# EAGLE board ScaleOffset-R3 (EAGLE 6.5.0)
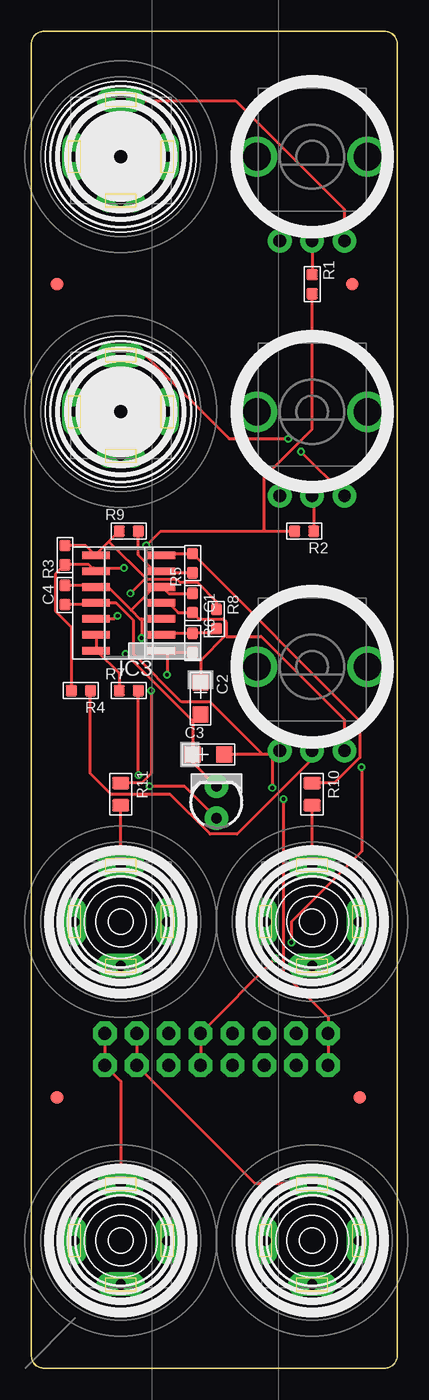
[diagram p0: board, top side]
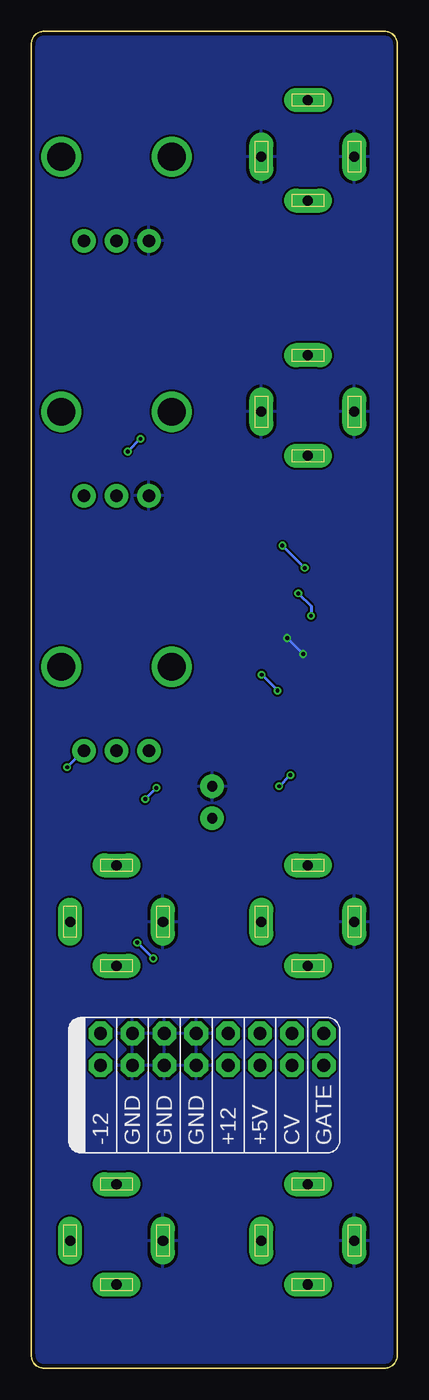
[diagram p1: board, bottom side, seen from below]

Size 29.14 x 106.5 mm. Coordinates in mm from the lower left corner, seen from the top.
Copper layers (1*16): Top 0.035mm / dielectric 1.5mm / Bottom 0.035mm
Design rules "ITEADstudio_DRC": minimum track width 6mil, minimum drill 12mil, track to track 6mil, track to pad 6mil, pad to pad 6mil, via to via 6mil, smd to smd 0mil, copper to edge 10mil, drill to drill 10mil, minimum pad ring 10mil, minimum via ring 6mil, stop-mask expansion 2mil, vias tented up to drill 100mil, thermal gap 10mil
Net classes: 0 default: width 0.254 mm

## Footprints (pad centres in the part's own frame; a part is rotated, then mirrored left to right if it is on the bottom)
C0603 = smd 0.889 x 0.889: 1 -0.762,0; 2 0.762,0
AVX-A = smd 1.27 x 1.27: + -1.27,0; - 1.27,0
3.5MM-JACK-SWITCH-13MM-OUTPUT = drill 0.8 pad 1.93 long: RING@3 -3.7,0; SECOND@3 0,-3.5; SWITCH@3 3.7,0; TIP@3 0,4.5
OG-POTS_ALPS_POT_VERTICAL = drill 1 pad 1.88: P$1 -2.58,-6.7; P$2 0,-6.7; P$3 2.58,-6.7 | drill 2.2 pad 3.175: P$4 4.4,0; P$5 -4.4,0
SO14 = smd 0.6 x 2.2: 1 -3.81,-2.6; 2 -2.54,-2.6; 3 -1.27,-2.6; 4 0,-2.6; 5 1.27,-2.6; 6 2.54,-2.6; 7 3.81,-2.6; 8 3.81,2.6; 9 2.54,2.6; 10 1.27,2.6; 11 0,2.6; 12 -1.27,2.6; 13 -2.54,2.6; 14 -3.81,2.6
3.5MM-JACK-SWITCH-13MM-INPUT = drill 0.8 pad 1.93 long: RING@3 -3.7,0; SECOND@3 0,-3.5; SWITCH@3 3.7,0; TIP@3 0,4.5
LED3MM = drill 0.813 pad 1.88: A -1.27,0; K 1.27,0
R0603 = smd 0.889 x 0.889: 1 -0.762,0; 2 0.762,0
C0805 = smd 1.016 x 1.397: 1 -0.889,0; 2 0.889,0
FIDUCIAL_1MM = smd 1 x 1: 1 0,0
POWER_16 = drill 1.016 pad 1.88 octagon: 1 -6.35,-1.27; 2 -6.35,1.27; 3 -3.81,-1.27; 4 -3.81,1.27; 5 -1.27,-1.27; 6 -1.27,1.27; 7 1.27,-1.27; 8 1.27,1.27; 9 3.81,-1.27; 10 3.81,1.27; 11 6.35,-1.27; 12 6.35,1.27; 13 8.89,-1.27; 14 8.89,1.27; 15 11.43,-1.27; 16 11.43,1.27

## Placement (x,y rotation side)
C1  100n  [C0603]  12.84,60.96 270 top
C2  [AVX-A]  13.47,53.34 270 top
C3  [AVX-A]  14.11,48.9 0 top
C4  100n  [C0603]  2.67,61.59 90 top
CV  CV  [3.5MM-JACK-SWITCH-13MM-OUTPUT]  22.36,10.16 0 top
GAIN1  Gain 1  [OG-POTS_ALPS_POT_VERTICAL]  22.36,96.52 0 top
GAIN2  Gain 2  [OG-POTS_ALPS_POT_VERTICAL]  22.36,76.2 0 top
GATE  GATE  [3.5MM-JACK-SWITCH-13MM-OUTPUT]  7.12,10.16 0 top
IC3  TL074D  [SO14]  7.76,60.96 90 top
IN1  Input 1  [3.5MM-JACK-SWITCH-13MM-INPUT]  7.12,96.52 0 top
IN2  Input 2  [3.5MM-JACK-SWITCH-13MM-INPUT]  7.12,76.2 0 top
LED1  REDBLUE  [LED3MM]  14.74,45.09 90 top
OFFSET  Offset  [OG-POTS_ALPS_POT_VERTICAL]  22.36,55.88 0 top
OUT1  2  [3.5MM-JACK-SWITCH-13MM-OUTPUT]  22.36,35.56 0 top
OUT2  1  [3.5MM-JACK-SWITCH-13MM-OUTPUT]  7.12,35.56 0 top
R1  100k  [R0603]  22.36,86.36 270 top
R2  100k  [R0603]  21.73,66.67 180 top
R3  100k  [R0603]  2.67,64.77 90 top
R4  100k  [R0603]  3.95,53.98 180 top
R5  100K  [R0603]  12.84,64.14 90 top
R6  100K  [R0603]  12.84,57.78 270 top
R7  1k  [R0603]  7.76,53.98 0 top
R8  100k  [R0603]  14.74,59.69 270 top
R9  100k  [R0603]  7.76,66.67 0 top
R10  51  [C0805]  22.36,45.72 270 top
R11  51  [C0805]  7.12,45.72 270 top
U$1  FIDUCIAL  [FIDUCIAL_1MM]  2.04,21.59 0 top
U$2  FIDUCIAL  [FIDUCIAL_1MM]  26.17,21.59 0 top
U$3  FIDUCIAL  [FIDUCIAL_1MM]  2.04,86.36 0 top
U$4  FIDUCIAL  [FIDUCIAL_1MM]  25.54,86.36 0 top
U$5  POWER  [POWER_16]  17.28,25.4 0 bottom
U$12  EURORACK_PCB6HP  [EURORACK6HPPCB]  -0.5,0 0 top

## Library data of the parts
C1-C4 R1-R11 = OPL
CV GATE OUT1 OUT2 = EurorackModularParts; DESC: Output; MPN: PJ-341; VALUE: PJ-341
GAIN1 GAIN2 OFFSET = EurorackModularParts; DESC: Parameter
IC3 U$5 U$12 = EurorackModularParts
IN1 IN2 = EurorackModularParts; DESC: Input; MPN: PJ-341; VALUE: PJ-341
LED1 = SparkFun-LED
U$1-U$4 = adafruit

## Nets
12V: C1.2 C2.+ IC3.4 OFFSET.P$3 U$5.9 U$5.10
-12V: C3.- C4.1 IC3.11 OFFSET.P$1 U$5.1 U$5.2
CV: CV.TIP@3 U$5.13 U$5.14
FBOUT1: IC3.7 R5.2 R10.1
FBOUT2: IC3.1 R6.2 R11.1
GATE: GATE.TIP@3 U$5.15 U$5.16
GND: C1.1 C2.- C3.+ C4.2 CV.RING@3 GAIN1.P$1 GAIN2.P$1 GATE.RING@3 IC3.3 IC3.5 IC3.10 IN1.RING@3 IN1.SWITCH@3 IN2.RING@3 IN2.SWITCH@3 LED1.K OUT1.RING@3 OUT2.RING@3 U$5.3 U$5.4 U$5.5 U$5.6 U$5.7 U$5.8
N$1: IC3.6 R5.1 R9.2
N$2: LED1.A R7.2
N$3: GAIN2.P$3 IN2.TIP@3
N$4: GAIN1.P$3 IN1.TIP@3
N$5: GAIN1.P$2 R1.1
N$6: GAIN2.P$2 R2.1
N$8: IC3.8 IC3.12 R3.2 R8.1 R9.1
N$11: IC3.13 IC3.14 R7.1
N$12: IC3.2 R6.1 R8.2
OFFSET: OFFSET.P$2 R4.1
OUT1: OUT1.TIP@3 R10.2
OUT2: OUT2.TIP@3 R11.2
SUMMING: IC3.9 R1.2 R2.2 R3.1 R4.2

## Tracks (layer width: path | path; a pad name or v marks a point on that pad's centre or on a via)
12V  (via drill 0.3)
  Top 0.254: U$5.9 U$5.10 v19.44,32.64 | IC3.4 10.93,60.96 11.69,60.2 C1.2 13.34,59.69 15.25,59.69 15.5,59.44 15.5,58.42 15.44,58.36 | C2.+ 13.47,56.39 15.44,58.36 | OFFSET.P$3 24.9,49.28 24.9,51.69 18.3,58.29 15.5,58.29 15.44,58.36 | v20.71,33.91 20.71,35.56 26.3,41.15 v26.3,47.88
  Bottom 0.254: v20.71,33.91 v19.44,32.64 | v26.3,47.88 25.03,49.15 OFFSET.P$3
-12V  (via drill 0.3)
  Top 0.254: U$5.1 U$5.2 23.63,27.94 20.07,31.5 v20.07,45.34 | C4.1 4.96,60.83 5.09,60.96 IC3.11 6.74,60.96 8.14,59.56 8.14,56.9 11.95,53.09 14.23,53.09 18.42,48.9 | 19.18,48.9 19.44,48.9 19.69,49.15 OFFSET.P$1 19.18,48.9 | 19.18,48.9 18.42,48.9 | 18.42,48.9 C3.- | 19.18,48.9 v19.18,46.23
  Bottom 0.254: v19.18,46.23 v20.07,45.34
CV
  Top 0.254: U$5.14 U$5.13 17.79,14.73 22.36,14.73 CV.TIP@3
FBOUT1
  Top 0.254: IC3.7 10.42,64.77 10.55,64.9 R5.2 26.17,51.56 26.17,48.64 24.14,46.61 R10.1
FBOUT2  (via drill 0.3)
  Top 0.254: 10.8,57.02 10.55,57.02 10.42,57.15 IC3.1 10.8,57.02 | 10.8,57.02 R6.2 | R11.1 8.77,46.61 9.53,47.37 v9.53,53.98 | 10.8,57.02 v10.8,55.24
  Bottom 0.254: v10.8,55.24 v9.53,53.98
GATE
  Top 0.254: U$5.16 U$5.15 7.12,22.86 GATE.TIP@3
GND  (via drill 0.3)
  Top 0.254: C2.- 12.9,51.5 | 12.9,51.5 12.84,51.44 C3.+ 12.84,48.26 LED1.K | C1.1 10.93,61.72 10.42,62.23 IC3.5 9.79,62.23 7.95,60.39 | C4.2 4.96,62.36 5.09,62.23 IC3.10 6.1,62.23 7.95,60.39 | 8.77,59.69 8.64,59.69 7.95,60.39 | 8.77,59.69 IC3.3 | v7.5,56.9 12.9,51.5 | 8.77,59.69 v8.77,58.17
  Bottom 0.254: v8.77,58.17 v7.5,56.9
  pour Bottom: -0.5,106.68 40.14,106.68 40.14,-1.27 -0.5,-1.27
N$1
  Top 0.254: R9.2 8.52,64.77 9.79,63.5 IC3.6 10.42,63.5 10.55,63.37 R5.1
N$2  (via drill 0.3)
  Top 0.254: v8.52,47.24 R7.2 | v9.41,46.35 12.2,46.35 LED1.A
  Bottom 0.254: v9.41,46.35 v8.52,47.24
N$3  (via drill 0.3)
  Top 0.254: v21.47,73.03 24.9,69.6 GAIN2.P$3 | v20.45,74.04 15.76,74.04 9.15,80.64 7.12,80.64 IN2.TIP@3
  Bottom 0.254: v20.45,74.04 v21.47,73.03
N$4
  Top 0.254: GAIN1.P$3 24.9,89.92 24.9,92.33 16.26,100.97 7.12,100.97 IN1.TIP@3
N$5
  Top 0.254: GAIN1.P$2 R1.1
N$6
  Top 0.254: R2.1 22.49,69.34 22.36,69.47 GAIN2.P$2
N$8  (via drill 0.3)
  Top 0.254: R3.2 4.33,65.53 5.09,64.77 | 5.09,64.77 6.17,65.85 | 6.17,65.85 R9.1 | 5.09,64.77 IC3.8 | R8.1 14.74,61.09 13.22,62.61 11.82,62.61 11.56,62.87 9.15,62.87 9.09,62.93 | 6.17,65.85 9.09,62.93 | IC3.12 6.61,59.69 v6.87,59.94 | 9.09,62.93 v7.88,61.72
  Bottom 0.254: v6.87,59.94 6.87,60.71 v7.88,61.72
N$11
  Top 0.254: R7.1 6.99,55.37 5.21,57.15 | 5.21,57.15 5.21,58.42 IC3.13 | 5.21,57.15 IC3.14
N$12
  Top 0.254: R8.2 14.36,58.55 R6.1 10.55,58.55 10.42,58.42 IC3.2
OFFSET
  Top 0.254: R4.1 4.71,47.37 6.36,45.72 11.06,45.72 14.23,42.55 16.39,42.55 22.36,48.51 OFFSET.P$2
OUT1
  Top 0.254: OUT1.TIP@3 R10.2
OUT2
  Top 0.254: OUT2.TIP@3 R11.2
SUMMING  (via drill 0.3)
  Top 0.254: R4.2 3.18,59.05 1.91,60.33 1.91,63.25 R3.1 4.58,64.01 5.09,63.5 IC3.9 4.96,63.75 v7.37,63.75 | 18.55,66.67 10.29,66.67 v9.15,65.53 | 18.55,66.67 R2.2 | R1.2 22.36,74.8 18.55,70.99 18.55,66.67
  Bottom 0.254: v7.37,63.75 v9.15,65.53